# Altium PCB HARDWARE_V2.PcbDoc
Units mil, origin at the board's own origin, x right, y up, seen from the top; angles counter-clockwise.
Board outline 3937.01 x 2775 mil, 2 copper layers (Top Layer, Bottom Layer); 51 components, 31 nets, 229 pads, 29 vias.
Unrouted connection lines stored in the file: 11.
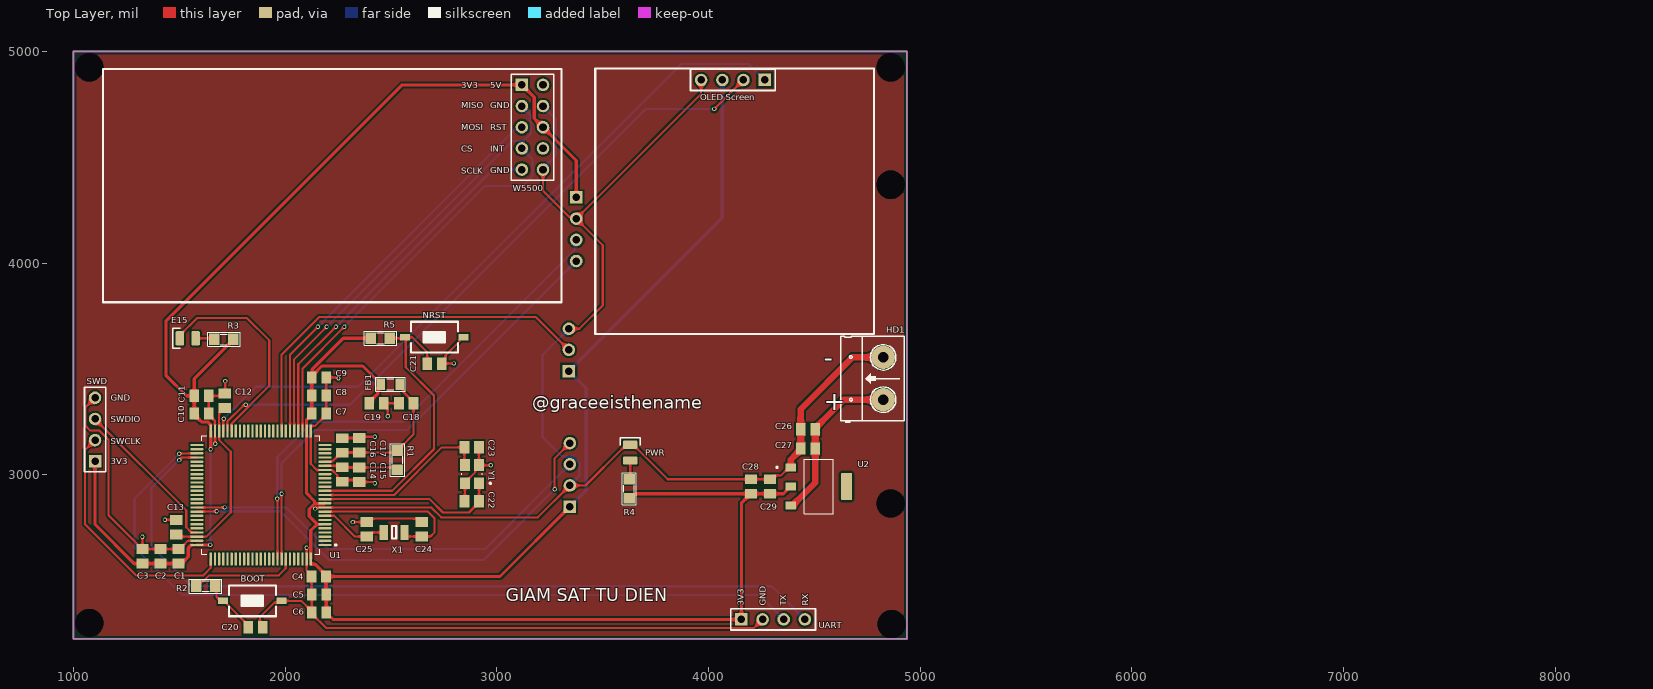
[diagram p0: Top Layer view]
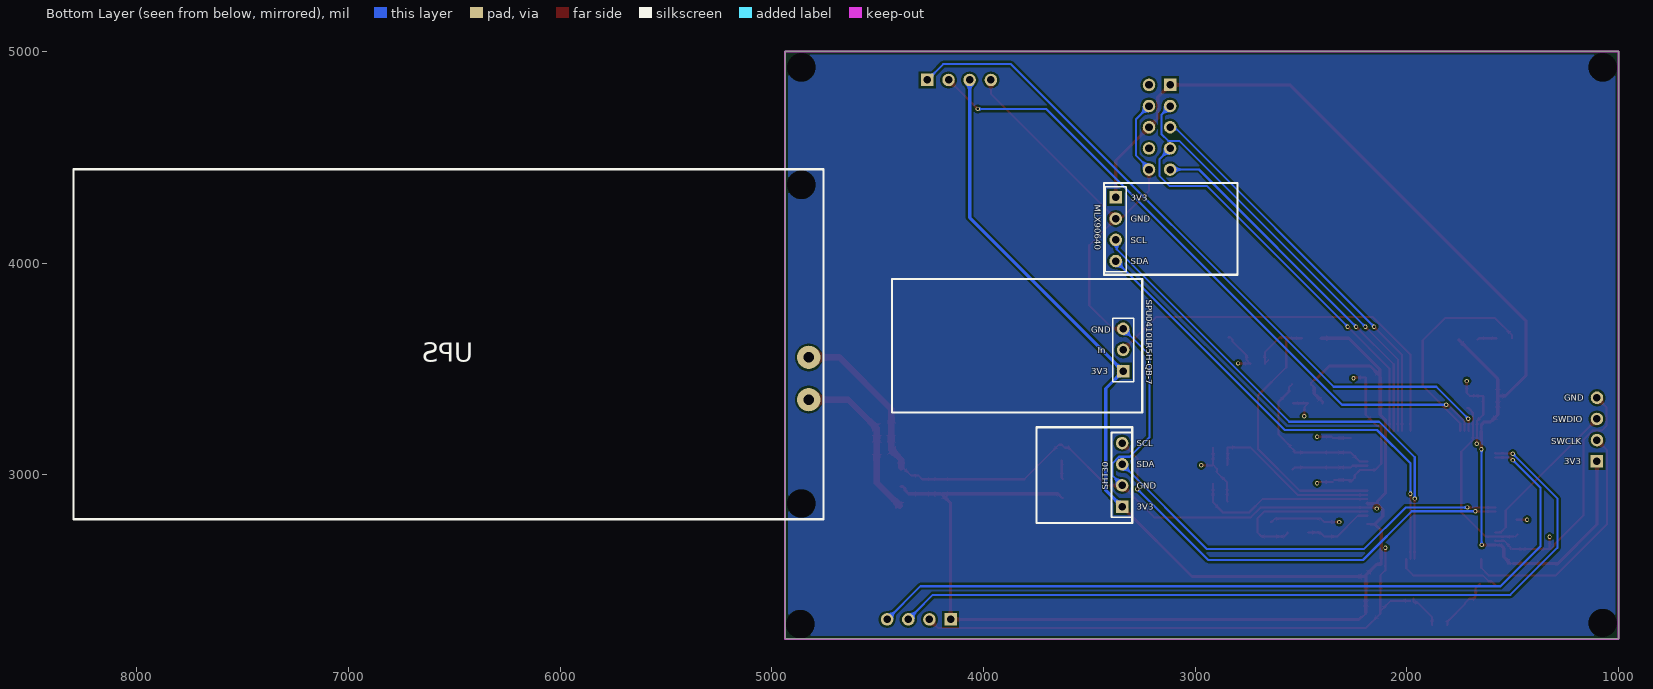
[diagram p1: Bottom Layer view, seen from below]
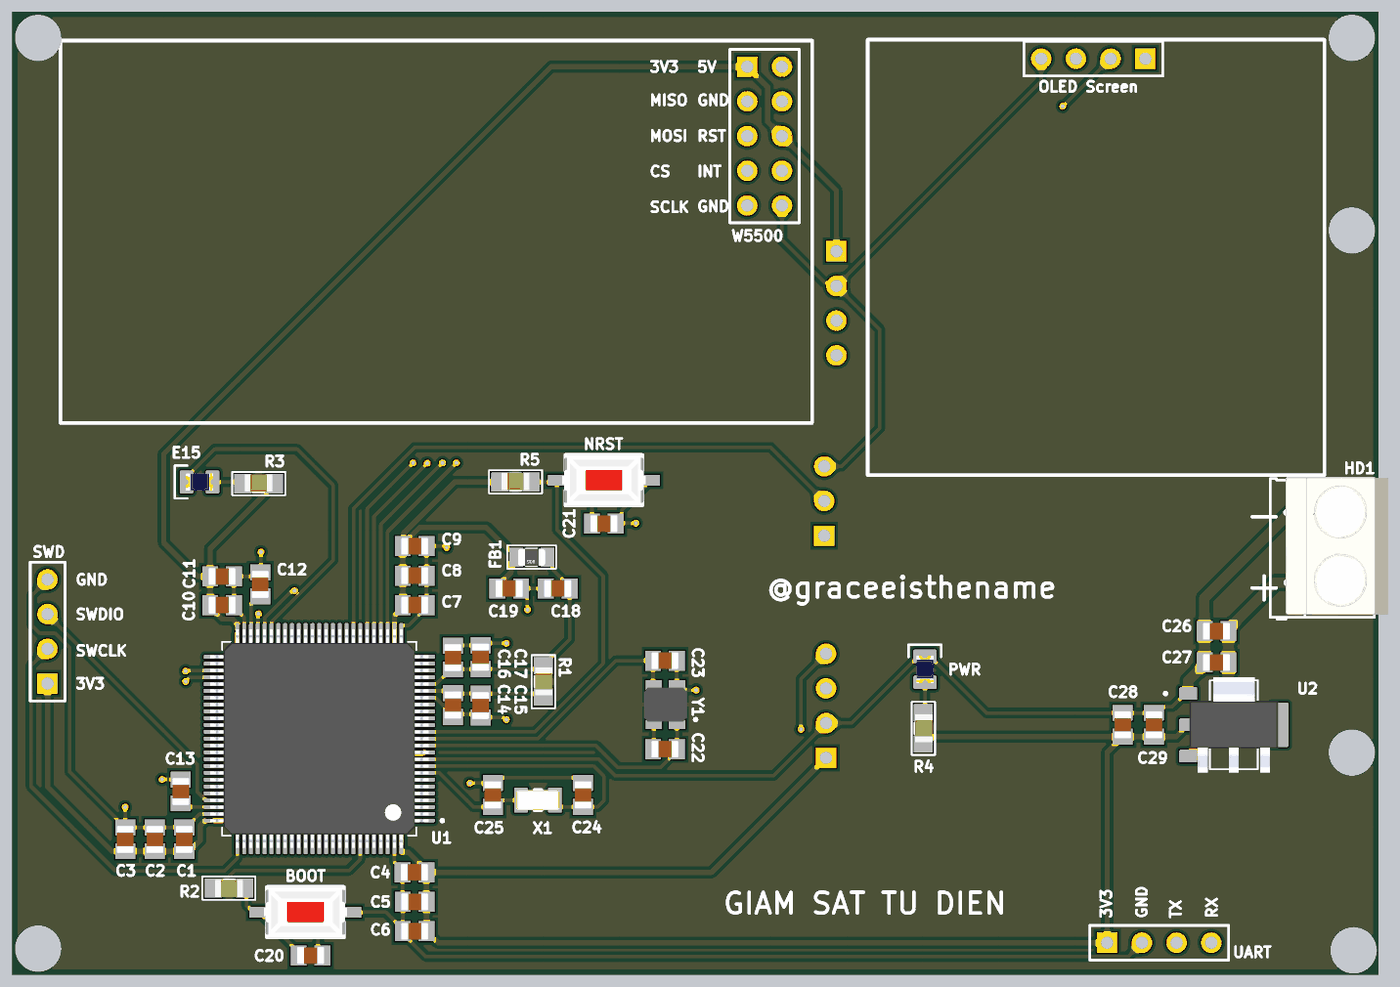
[diagram p2: 3D render of the assembled board from above, using the file's embedded part models]

## Layer stack, top to bottom
Top Solder: solder mask 0.4, Solder Resist, Dk 3.5
Top Layer: signal copper 1.4
Dielectric 1: dielectric 12.6, FR-4, Dk 4.8
Bottom Layer: signal copper 1.4
Bottom Solder: solder mask 0.4, Solder Resist, Dk 3.5

## Board outline
1000,2225 1000,5000 4937.01,5000 4937.01,2225

## Design rules (kind name [scope] priority, off if disabled: settings)
Clearance [All] p1: gap=1 ignorepadtopadclearanceinfootprint=TRUE
Creepage [All] p1: checkdistance=10 applytopolygonpour=TRUE
PolygonConnect [All] p1: connectstyle=Relief reliefconductorwidth=10 reliefentries=4 polygonreliefangle="90 Angle" airgapwidth=10
RoutingVias [All] p1: holewidth=28 width=50 viastyle="Through Hole" minholewidth=28 minwidth=50 maxholewidth=28 maxwidth=50
SolderMaskExpansion [All] p1: expansion=4 istentingtop=FALSE
Width [All] p1: maxlimit=50 minlimit=10 preferedwidth=10 minimp=50.000000 maximp=50.000000 favimp=50.000000
30 further rules are at their usual default settings.

## Classes and differential pairs
component class Display: "OLED Screen" UART
component class Sensors: MLX90640 SHT30 SPU0410LR5H-QB-7
component class Power: C26 C27 C28 C29 HD1 PWR R4 U2
component class MCU: BOOT C1 C2 C3 C4 C5 C6 C7 C8 C9 C10 C11 C12 C13 C14 C15 C16 C17 C18 C19 C20 C21 C22 C23 C24 C25 E15 FB1 NRST R1 R2 R3 R5 SWD U1 X1 Y1
component class Ethernet: W5500

## Components (designator, comment, footprint, x,y, rotation, side; value= is the part's Value field where it differs from the comment)
BOOT "SW-SMD" SW-SMD 1845,2405 r0 top
C1 "100nF" CAPC2012X145N 1496,2615 r270 top
C2 "100nF" CAPC2012X145N 1411,2615 r270 top
C3 "100nF" CAPC2012X145N 1326,2615 r270 top
C4 "100nF" CAPC2012X145N 2159.29,2520 r0 top
C5 "100nF" CAPC2012X145N 2160,2435 r0 top
C6 "100nF" CAPC2012X145N 2160,2350 r0 top
C7 "100nF" CAPC2012X145N 2160,3290 r180 top
C8 "100nF" CAPC2012X145N 2160,3375 r180 top
C9 "100nF" CAPC2012X145N 2160,3460 r180 top
C10 "100nF" CAPC2012X145N 1605,3290 r180 top
C11 "4.7uF" CAPC2012X145N 1605,3373 r180 top
C12 "2.2uF" CAPC2012X145N 1715,3350 r270 top
C13 "2.2uF" CAPC2012X145N 1486,2753 r270 top
C14 "100nF" CAPC2012X145N 2270,3002 r90 top
C15 "1uF" CAPC2012X145N 2350,3000.71 r90 top
C16 "100nF" CAPC2012X145N 2270,3139 r270 top
C17 "1uF" CAPC2012X145N 2350,3140 r270 top
C18 "100nF" CAPC2012X145N 2572,3338 r0 top
C19 "100nF" CAPC2012X145N 2432,3338 r180 top
C20 "100nF" CAPC2012X145N 1860,2280 r180 top
C21 "100nF" CAPC2012X145N 2705,3525 r180 top
C22 "10pF" CAPC2012X145N 2881,2875 r0 top
C23 "10pF" CAPC2012X145N 2881,3130 r180 top
C24 "10pF" CAPC2012X145N 2645,2743 r270 top
C25 "10pF" CAPC2012X145N 2385,2743 r270 top
C26 "100nF" CAPC2012X145N 4470,3215 r0 top
C27 "10uF" CAPC2012X145N 4470,3125 r0 top
C28 "100nF" CAPC2012X145N 4200,2945 r270 top
C29 "10uF" CAPC2012X145N 4290,2945 r270 top
E15 "BLUE" LED_0805_BLUE 1540,3645 r0 top
FB1 "Ferrit Bead" RES-SMD-0805 2497,3428 r180 top
HD1 "Header 2" HED2 4825,3355 r90 top
MLX90640 "Header 4" HDR1X4 3375,4310 r270 bottom
NRST "SW-SMD" SW-SMD 2705,3650 r0 top
"OLED Screen" "Header 4" HDR1X4 4265,4865 r180 top
PWR "BLUE" LED_0805_BLUE 3630,3105 r270 top
R1 "47" SM-0805 2530,3070 r90 top value=1K
R2 "10K" SM-0805 1625,2475 r0 top value=1K
R3 "10K" SM-0805 1710,3640 r180 top value=1K
R4 "10K" SM-0805 3625,2935 r90 top value=1K
R5 "10K" SM-0805 2450,3645 r180 top value=1K
SHT30 "Header 4" HDR1X4 3345,2850 r90 bottom
SPU0410LR5H-QB-7 "Header 3" HDR1X3 3340,3490 r90 bottom
SWD "Header 4" HDR1X4 1102,3064 r90 top
U1 "STM32H743VIT6" QFP50P1600X1600X160-100N 1885,2905 r180 top
U2 "AMS1117-3.3" SOT229P700X180-4N 4520,2945 r0 top
UART "Header 4" HDR1X4 4155,2317 r0 top
W5500 "Header 5X2" HDR2X5 3118,4842 r270 top
X1 "32.768kHz" XTAL_3215-2 2515,2728 r180 top
Y1 "25MHz" XTAL_ABM8G-25.000MHZ-B4Y-T 2882.54,3003.31 r180 top

## Footprints (in the part's own frame and the unit in brackets; to place one, negate y for a bottom-side part, rotate by r counter-clockwise, add the part's x,y. Pads: shape width x height; smd on the part's side, far side on the other; paste and mask are expansions set on the pad)
CAPC2012X145N [mm]
  rect 1.17x1.47 smd: 1(-0.871,0) 2(0.871,0)
  body extent -1,-0.63 1,0.63, height 1.45
HDR1X3 [mm] "Connector; Header; 3 Position"
  rect 1.5x1.5 hole 0.9: 1(0,0)
  round 1.5 hole 0.9: 2(2.54,0) 3(5.08,0)
  silkscreen extent -1.27,-1.27 6.35,1.27, body extent -1.27,-1.27 6.35,1.27, height 7
HDR1X4 [mm] "Connector; Header; 4 Position"
  rect 1.5x1.5 hole 0.9: 1(0,0)
  round 1.5 hole 0.9: 2(2.54,0) 3(5.08,0) 4(7.62,0)
  silkscreen extent -1.27,-1.27 8.89,1.27, body extent -1.27,-1.27 8.89,1.27, height 7
HDR2X5 [mm] "Connector; Header; 5x2 Position"
  rect 1.5x1.5 hole 0.9: 1(0,0)
  round 1.5 hole 0.9: 2(0,2.54) 3(2.54,0) 4(2.54,2.54) 5(5.08,0) 6(5.08,2.54) 7(7.62,0) 8(7.62,2.54) 9(10.16,0) 10(10.16,2.54)
  silkscreen extent -1.27,-1.27 11.43,3.81, body extent -1.27,-1.27 11.43,3.81, height 7
HED2 [mil] "Header 2, 2 pin, hight 300mil, Pin to Pin 200, Colour Green"
  round 110 hole 50: 1(0,0) 2(200,0)
  silkscreen extent -106,-100 300,200, body extent -92,-140 302,155, height 394
LED_0805_BLUE [mm]
  rrect25% 1x1.7 smd: A(0.95,0) K(-0.95,0)
  silkscreen extent -1.8,-1.2 -0.9,1.2, body extent -1,-0.63 1,0.63, height 1.12
QFP50P1600X1600X160-100N [mm]
  rrect50% 1.56x0.28 smd: 1(-7.68,6) 2(-7.68,5.5) 3(-7.68,5) 4(-7.68,4.5) 5(-7.68,4) 6(-7.68,3.5) 7(-7.68,3) 8(-7.68,2.5) 9(-7.68,2) 10(-7.68,1.5) 11(-7.68,1) 12(-7.68,0.5) 13(-7.68,0) 14(-7.68,-0.5) 15(-7.68,-1) 16(-7.68,-1.5) 17(-7.68,-2) 18(-7.68,-2.5) 19(-7.68,-3) 20(-7.68,-3.5) 21(-7.68,-4) 22(-7.68,-4.5) 23(-7.68,-5) 24(-7.68,-5.5) 25(-7.68,-6) 51(7.68,-6) 52(7.68,-5.5) 53(7.68,-5) 54(7.68,-4.5) 55(7.68,-4) 56(7.68,-3.5) 57(7.68,-3) 58(7.68,-2.5) 59(7.68,-2) 60(7.68,-1.5) 61(7.68,-1) 62(7.68,-0.5) 63(7.68,0) 64(7.68,0.5) 65(7.68,1) 66(7.68,1.5) 67(7.68,2) 68(7.68,2.5) 69(7.68,3) 70(7.68,3.5) 71(7.68,4) 72(7.68,4.5) 73(7.68,5) 74(7.68,5.5) 75(7.68,6)
  rrect50% 0.28x1.56 smd: 26(-6,-7.68) 27(-5.5,-7.68) 28(-5,-7.68) 29(-4.5,-7.68) 30(-4,-7.68) 31(-3.5,-7.68) 32(-3,-7.68) 33(-2.5,-7.68) 34(-2,-7.68) 35(-1.5,-7.68) 36(-1,-7.68) 37(-0.5,-7.68) 38(0,-7.68) 39(0.5,-7.68) 40(1,-7.68) 41(1.5,-7.68) 42(2,-7.68) 43(2.5,-7.68) 44(3,-7.68) 45(3.5,-7.68) 46(4,-7.68) 47(4.5,-7.68) 48(5,-7.68) 49(5.5,-7.68) 50(6,-7.68) 76(6,7.68) 77(5.5,7.68) 78(5,7.68) 79(4.5,7.68) 80(4,7.68) 81(3.5,7.68) 82(3,7.68) 83(2.5,7.68) 84(2,7.68) 85(1.5,7.68) 86(1,7.68) 87(0.5,7.68) 88(0,7.68) 89(-0.5,7.68) 90(-1,7.68) 91(-1.5,7.68) 92(-2,7.68) 93(-2.5,7.68) 94(-3,7.68) 95(-3.5,7.68) 96(-4,7.68) 97(-4.5,7.68) 98(-5,7.68) 99(-5.5,7.68) 100(-6,7.68)
  silkscreen extent -9.1,-7.1 7.1,7.1, body extent -8,-8 8,8, height 1.6
RES-SMD-0805 [mil]
  rect 39.37x55 smd: 1(-45,0) 2(45,0)
  silkscreen extent -70,-34 70,33, body extent -39,-25 39,25, height 31
SM-0805 [mil] "Compoment SMD 80x50mil"
  rect 50x55 smd: 1(-45,0) 2(45,0)
  silkscreen extent -77,-34 76,33, body extent -40,-27 40,23, height 24
SOT229P700X180-4N [mm]
  rrect15% 1.31x0.93 smd: 1(-3.345,2.29) 2(-3.345,0) 3(-3.345,-2.29)
  rrect15% 1.31x3.24 smd: 4(3.345,0)
  silkscreen extent -5.1,-3.25 1.75,3.25, body extent -3.25,-3.5 3.25,3.5, height 1.8
SW-SMD [mm] "Switch SMD type"
  rect 1.2x0.8 smd: 1(-3.5,0) 2(3.5,0)
  silkscreen extent -2.82,-1.85 2.82,1.85, body extent -3.05,-1.85 3.05,1.85, height 2.5
XTAL_3215-2 [mm]
  rrect10% 1x1.8 smd: 1(-1.25,0) 2(1.25,0)
  silkscreen extent -0.25,-0.75 0.25,0.75, body extent -1.6,-0.75 1.6,0.75, height 0.91
XTAL_ABM8G-25.000MHZ-B4Y-T [mm]
  rect 1.2x1.4 smd: 1(-0.85,1.1) 2(-0.85,-1.1) 3(0.85,-1.1) 4(0.85,1.1)
  silkscreen extent -2.3,-0.08 1.25,1.2, body extent -1.6,-1.24 1.6,1.24, height 0.99

## Part data
BOOT NRST: "Switch", LatestRevisionDate=17-Jul-2002, LatestRevisionNote="Re-released for DXP Platform.", PackageReference=SPST-2, Published=24-Mar-1999, Publisher="Altium Limited"
C1 C2 C3 C4 C5 C6 C7 C8 C9 C10 C12 C13 C14 C15 C16 C17 C18 C19 C20 C21 C22 C23 C24 C25 C26 C27 C28 C29: library part VJ0805A390GXCAP, "39 pF Â±2% 200V Ceramic Capacitor C0G, NP0 0805 (2012 Metric)", Package="2012 Vishay Vitramon", Check_prices=https://www.snapeda.com/parts/VJ0805A390GXCAP/Vishay/view-part/?ref=eda, MF="Vishay Vitramon", MP=VJ0805A390GXCAP, SnapEDA_Link=https://www.snapeda.com/parts/VJ0805A390GXCAP/Vishay/view-part/?ref=snap
C11: library part CAP_TAN_SMD, "Polazied Tantalum Capacitor"
E15 PWR: library part LED_0805_BLUE, "LED 0805 BLUE SMD"
FB1: "Generic Ferrit Bead"
HD1: library part Hed2, "Header 2 (Green)"
MLX90640 "OLED Screen" SHT30 SWD UART: "Header, 4-Pin", LatestRevisionDate=17-Jul-2002, LatestRevisionNote="Re-released for DXP Platform.", Publisher="Altium Limited"
R1 R2 R3 R4 R5: library part RM, "Resistor SMD"
SPU0410LR5H-QB-7: "Header, 3-Pin", LatestRevisionDate=17-Jul-2002, LatestRevisionNote="Re-released for DXP Platform.", Publisher="Altium Limited"
U1: "ARMÂ® CortexÂ®-M7 STM32H7 Microcontroller IC 32-Bit Single-Core 480MHz 2MB (2M x 8) FLASH 100-LQFP (14x14)", Package="LQFP-100 STMicroelectronics", Check_prices=https://www.snapeda.com/parts/STM32H743VIT6/STMicroelectronics/view-part/?ref=eda, MF=STMicroelectronics, MP=STM32H743VIT6, SnapEDA_Link=https://www.snapeda.com/parts/STM32H743VIT6/STMicroelectronics/view-part/?ref=snap
U2: "Sot223/Pkg 1-Amp 3.3-Volt Low Drop Out Voltage Regulatator", Package="SOT-223 Seeed Technology", Check_prices=https://www.snapeda.com/parts/AMS1117-3.3/Advanced+Monolithic+Systems/view-part/?ref=eda, MF="Advanced Monolithic Systems", MP=AMS1117-3.3, SnapEDA_Link=https://www.snapeda.com/parts/AMS1117-3.3/Advanced+Monolithic+Systems/view-part/?ref=snap
W5500: "Header, 5-Pin, Dual row", LatestRevisionDate=17-Jul-2002, LatestRevisionNote="Re-released for DXP Platform.", Publisher="Altium Limited"
X1: library part XTAL_3215, "Crystal SMD 3215"
Y1: library part ABM8G-25.000MHZ-B4Y-T, "25 MHz Â±30ppm Crystal 10pF 60 Ohms 4-SMD, No Lead", Package="SMD-4 Abracon", Availability="In Stock", Check_prices=https://www.snapeda.com/parts/ABM8G-25.000MHZ-B4Y-T/Abracon+LLC/view-part/?ref=eda, MF=Abracon, MP=ABM8G-25.000MHZ-B4Y-T, Price=None, Purchase-URL=https://pricing.snapeda.com/search/part/ABM8G-25.000MHZ-B4Y-T/?ref=eda, SnapEDA_Link=https://www.snapeda.com/parts/ABM8G-25.000MHZ-B4Y-T/Abracon+LLC/view-part/?ref=snap

## Free pads (board coordinates)
  round 60 hole 133.86 unplated: 2(4865,2295) 3(4860,2865) 4(4860,4370) 5(4860,4925) 6(1075,4925) 7(1075,2300)

## Via types
v1: diameter 20, hole 11.81, Top Layer to Bottom Layer, 28 vias
v2: diameter 20, hole 10, Top Layer to Bottom Layer, 1 vias

## Nets (pads, with @x,y where several pads share a name; then routed paths per layer and width w, separated by ;. In a path a pad name is that pad's centre, name@x,y a point inside that pad or via, vN(x,y) a via of type N, cw(c..) or ccw(c..) an arc to the next point about the centre after c; other vN are vias at no path point)
12V: C26.2 C27.2 HD1.1 U2.3 | length 794.7
  Top Layer w10: U2.3 U2.3@4395.79,2854.84
  Top Layer w20: C26.2 C26.2@4504.29,3220.91
  Top Layer w30: U2.3@4395.79,2854.84 4504.29,2963.35 C27.2 C26.2 ; C26.2@4504.29,3220.91 4638.39,3355 HD1.1
+3V3: "OLED Screen.3" C1.2 C2.2 C3.2 C4.2 C5.2 C6.2 C7.2 C8.2 C9.2 C10.2 C11.2 C19.2 C28.2 C29.2 FB1.2 MLX90640.1 R3.1 R4.1 R5.2 SHT30.1 SPU0410LR5H-QB-7.1 SWD.1 U1.6 U1.11 U1.27 U1.50 U1.75 U1.100 U2.2 UART.1 W5500.1 W5500.6 | length 14496.8
  Top Layer w10: C1.2 C1.2@1501.91,2580.71 ; U1.75@1555.27,2668.27 1582.13,2668.27 U1.75 U1.75@1582.75,2668.89 ; C10.2@1570.71,3284.09 C10.2 ; v1@1645.89,2668.89 v1(1646,2669) ; v1(1648,3121) v1@1648.39,3121.39 ; U1.50@1648.27,3236.73 1648.27,3207.87 U1.50 U1.50@1648.39,3206.97 ; R3.1@1755,3637.5 R3.1 ; U1.100 2121.22,2578.27 U1.100@2121.73,2577.76 ; C7.2@2125.71,3284.09 C7.2 ; C9.2 2125.71,3465.91 C9.2@2128.08,3468.28 ; 2151.2,2767.2 U1.6 ; C5.2@2193.58,2435.71 C5.2 ; C4.2 C4.2@2193.58,2525.91 ; C6.2 2194.29,2344.09 2212.32,2326.06 2218.23,2326.06 ; C19.2 C19.2@2397.71,3343.91 ; 2429.5,3450.5 2437.32,3450.5 2452,3435.81 FB1.2 FB1.2@2437.32,3413.31 ; R4.1 3627.5,2890 R4.1@3648.21,2910.71 ; C28.2@4194.09,2910.71 C28.2
  Top Layer w15: SWD.1 1102,2766 1287.29,2580.71 C3.2 C2.2 C1.2 ; C1.2@1510.91,2580.71 1542,2611.8 1542,2655 U1.75@1555.27,2668.27 ; C10.2@1570.71,3284.09 1604.8,3250 1635,3250 U1.50@1648.27,3236.73 ; C10.2 C11.2 ; U1.75@1582.75,2668.89 v1@1645.89,2668.89 ; v1@1648.39,3121.39 U1.50@1648.39,3206.97 ; R3.1@1755,3637.5 1570.71,3453.21 C11.2 ; U1.100 2121.22,2737.22 2151.2,2767.2 2114,2804.41 2114,2838.8 2138.89,2863.68 ; U1.100@2121.73,2577.76 2141.73,2577.76 C4.2@2193.58,2525.91 ; C7.2@2125.71,3284.09 2101.54,3259.92 U1.27 2101.54,2913.46 2138.89,2876.11 2138.89,2863.68 ; C7.2 C8.2 C9.2 ; U1.11 2185.42,2863.68 2138.89,2863.68 ; C5.2@2193.58,2435.71 C4.2 3015,2520 SHT30.1 ; C6.2 C5.2 ; 2218.23,2326.06 2227.29,2317 UART.1 4155,2865.71 C28.2@4194.09,2904.8 ; C19.2@2397.71,3343.91 2437.32,3383.51 FB1.2@2437.32,3413.31 ; R5.2 2275,3645 2128.08,3498.08 2128.08,3468.28 2173.8,3514 2366,3514 2429.5,3450.5 ; MLX90640.1 3375,4485 W5500.6 3177,4683 3177,4783 W5500.1 2553,4842 1437,3726 1437,3470 1534,3373 C11.2 ; R4.1@3648.21,2910.71 C28.2@4194.09,2910.71 ; C28.2 C29.2 4354.02,2910.71 4370.02,2926.71 4370.02,2934.19 4380.83,2945 U2.2
  Bottom Layer w10: v1(1646,2669) 1647,2670 1647,3120 v1(1648,3121)
  Bottom Layer w15: SHT30.1 3422,2927 3422,3408 SPU0410LR5H-QB-7.1 4065,4215 4065,4865
ADC1_IN8: SPU0410LR5H-QB-7.2 U1.33 | length 1855
  Top Layer w10: U1.33 1983.43,3568.43 2160,3745 3185,3745 SPU0410LR5H-QB-7.2
BOOT0: R2.1 U1.94 | length 503.5
  Top Layer w10: R2.1 1580,2477.5 1600,2497.5 1613.5,2497.5 1641,2525 1970,2525 2003.11,2558.11 U1.94
GND: "OLED Screen.4" BOOT.2 C1.1 C2.1 C3.1 C4.1 C5.1 C6.1 C7.1 C8.1 C9.1 C10.1 C11.1 C12.1 C13.1 C14.1 C15.1 C16.1 C17.1 C18.1 C19.1 C20.1 C21.1 C22.1 C23.1 C24.1 C25.1 C26.1 C27.1 C28.1 C29.1 HD1.2 MLX90640.2 NRST.2 PWR.K SHT30.2 SPU0410LR5H-QB-7.3 SWD.4 U1.10 U1.19 U1.26 U1.49 U1.74 U1.99 U2.1 UART.2 W5500.4 W5500.10 Y1.2 Y1.4 | length 12961.6
  Top Layer w10: SWD.4 1057,3319 1057,3232 1080,3209 1123,3209 1166,3166 1166,2809.29 1302.06,2673.23 1302.06,2667.32 1320.09,2649.29 C3.1 ; v1(1326,2708) C3.1 ; v1(1432,2788) C13.1@1482.71,2788 ; C1.1@1501.91,2649.29 C1.1 C2.1 C3.1 ; C1.1@1510.91,2649.29 1510.91,2658.29 1540.57,2687.95 1582.13,2687.95 U1.74 ; v1(1670,3147) 1668.98,3148.02 1668.98,3206.85 U1.49 1668.46,3254.92 1639.29,3284.09 C10.1 C11.1 1703.71,3373 C12.1 1717,3386.29 v1(1717,3443) ; C20.1@1879.29,2290 1880.87,2291.58 1880.87,2328.08 1949.17,2396.38 1950.03,2397.24 1964.17,2397.24 1967.8,2400.86 BOOT.2@1967.8,2415 ; BOOT.2 2076.61,2405 C6.1@2125.71,2355.91 ; v1(2101,2656) 2101.27,2655.73 2101.27,2602.91 U1.99 2101.54,2549.37 2125,2525.91 C4.1 2125,2435.71 C5.1 C6.1@2125.71,2355.91 ; v1(2142.18,2840.82) 2144.89,2840.82 2149.51,2845.43 2186.85,2845.43 U1.10 2690.06,2845.94 2737,2799 3194,2799 SHT30.2 3419,2950 3596.72,3127.72 3615.31,3127.72 PWR.K 3643.78,3142.4 3806.89,2979.29 C28.1 C29.1 4308.03,2997.32 4342.99,2997.32 4380.83,3035.16 U2.1 ; v2(2252,3456) 2249.29,3456 2245.29,3460 C9.1 C8.1 C7.1 2194.29,3284.09 2141.73,3231.54 2121.73,3231.54 2121.22,3231.02 U1.26 2121.22,3051.78 2149.89,3023.11 U1.19 2187.87,3022.6 2221.4,3022.6 2246.06,2997.94 2246.06,2985.74 2264.09,2967.71 C14.1 ; C16.1@2264.09,3173.29 C16.1 ; C14.1@2265,2975.71 C15.1@2345,2975.71 ; C16.1@2265,3174.29 C17.1 2355.71,3180 v1(2424,3180) ; v1(2319,2777) 2384.71,2777 C25.1 2390.91,2777.29 2406.61,2793 2623.39,2793 2639.09,2777.29 C24.1 ; C15.1 2414.88,2966.42 2421.29,2960 v1(2424,2960) ; v1(2485,3277) 2484.32,3277.68 2484.32,3319.97 C19.1 C18.1 ; v1(2797,3526) 2740.29,3526 C21.1 2757.32,3543.03 2757.32,3564.53 2824.17,3631.38 2824.17,3639.25 2834.92,3650 NRST.2 ; C22.1 2849.07,2877.36 Y1.4 2849.07,2963.94 2897.38,3012.24 2897.38,3029.41 2915.29,3047.32 C23.1 ; Y1.2 2917.61,3045 v1(2971,3045) ; W5500.10 3218,4342 3340.61,4219.39 3365.61,4219.39 MLX90640.2 ; SPU0410LR5H-QB-7.3 3390,3690 3500,3800 3500,4085 MLX90640.2 ; 3965,4865 3965,4800 MLX90640.2 ; UART.2 4215,2277 2192.8,2277 2125.71,2344.09 C6.1 C6.1@2125.71,2355.91 ; C27.1@4435.71,3119.09 C27.1
  Top Layer w20: C26.1@4435,3215.71 C26.1
  Top Layer w30: U2.1 4388.31,3071.69 C27.1@4435.71,3119.09 ; C26.1@4435,3215.71 4435,3310 4680,3555 HD1.2 ; C27.1 C26.1
  Bottom Layer w10: W5500.10 3218,4447 3279,4508 3279,4681 W5500.4 ; SPU0410LR5H-QB-7.3 3215,3565 3215,3179 3308.47,3085.53 3359.72,3085.53 3390,3055.24 3390,2995 SHT30.2
HSE_IN: C22.2 U1.12 Y1.1 | length 864.6
  Top Layer w10: U1.12 2682.68,2885.32 2746,2822 2868.2,2822 2915.29,2869.09 C22.2 ; C22.2@2916,2875 Y1.1
HSE_OUT: C23.2 U1.13 Y1.3 | length 836.9
  Top Layer w10: U1.13 2515,2905 2740,3130 C23.2 2846.71,3048.98 Y1.3
I2C1_SCL: MLX90640.3 U1.92 | length 2341.5
  Top Layer w10: v1(1963,2888) 1963.74,2887.26 U1.92
  Bottom Layer w10: v1(1963,2888) 1963,3083 2131,3251 2556,3251 3370.47,4065.47 3370.47,4105.47 MLX90640.3
I2C1_SDA: MLX90640.4 U1.93 | length 2239.5
  Top Layer w10: v1(1983,2911) 1983.21,2910.79 1983.21,2602.85 U1.93
  Bottom Layer w10: v1(1983,2911) 1983,3054 2141,3212 2577,3212 MLX90640.4
I2C2_SCL: "OLED Screen.2" U1.46 | length 3150.5
  Top Layer w10: U1.46 1727.52,3252.52 1804.4,3329.4 1811.77,3329.4 v1(1813.69,3331.31) ; v1(4027,4728) 4027.5,4728 4164.5,4865 4165,4865
  Bottom Layer w10: v1(1813.69,3331.31) 2306.31,3331.31 3703,4728 v1(4027,4728)
I2C2_SDA: "OLED Screen.1" U1.47 | length 3338.4
  Top Layer w10: U1.47 1708.35,3207.87 1708.35,3263.35 v1(1710,3265)
  Bottom Layer w10: v1(1710,3265) 1861,3416 2346,3416 3870,4940 4190,4940 4265,4865
I2C3_SCL: SHT30.4 U1.67 | length 2172.5
  Top Layer w10: U1.67 1583.15,2826.77 1674.77,2826.77 v1(1676,2828) ; v1(3273,2932) 3273,3078 SHT30.4
  Bottom Layer w10: v1(1676,2828) 1977,2828 2207,2598 2938,2598 3272,2932 v1(3273,2932)
I2C3_SDA: SHT30.3 U1.66 | length 2010.1
  Top Layer w10: U1.66@1582.67,2845.97 v1(1714,2846)
  Bottom Layer w10: v1(1714,2846) 2006,2846 2203,2649 2944,2649 SHT30.3
LED: E15.K U1.45 | length 1014.6
  Top Layer w10: E15.K 1502.6,3658.78 1583.82,3740 1820,3740 1925,3635 1925,3420 1747.72,3242.72 1747.72,3235.41 1747.72,3207.87 U1.45
LSE_IN: C24.2 U1.9 X1.1 | length 758.2
  Top Layer w10: U1.9 2674.74,2826.26 2705,2796 2705,2727 2686.71,2708.71 C24.2 2578.9,2708.71 2564.21,2723.39 X1.1
LSE_OUT: C25.2 U1.8 X1.2 | length 327
  Top Layer w10: U1.8 2231.43,2806.57 2329.29,2708.71 C25.2 2390.91,2708.71 2410.2,2728 X1.2
NetBOOT_1: BOOT.1 C20.2 R2.2 | length 270.8
  Top Layer w10: R2.2@1655,2485 1675,2465 1675,2425.75 1685.75,2415 1692.2,2415 1705.08,2415 1725.83,2394.25 1725.83,2389.25 1807.68,2307.4 1807.68,2293.03 C20.2@1810.71,2290
NetE15_A: E15.A R3.2 | length 89.7
  Top Layer w10: E15.A 1660,3645 R3.2
NetPWR_A: PWR.A R4.2 | length 89.7
  Top Layer w10: R4.2 3630,2985 PWR.A
NRST: C21.2 NRST.1 R5.1 U1.14 | length 1467.2
  Top Layer w10: U1.14 2505.69,2924.69 2703,3122 2703,3375 2570,3508 2570,3642.8 NRST.1@2565,3647.8 ; R5.1 2562.2,3645 NRST.1@2565,3647.8 ; C21.2@2652.68,3543.03 C21.2 2670.71,3579.29 2600,3650 NRST.1 NRST.1@2565,3647.8
RX: U1.54 UART.4 | length 3778.3
  Top Layer w10: v1(1500,3070) 1511.65,3081.65 1582.13,3081.65 U1.54
  Bottom Layer w10: v1(1500,3070) 1369,2939 1369,2663 1558,2474 4298,2474 UART.4
SPI1_CS: U1.28 W5500.7 | length 1908.9
  Top Layer w10: U1.28 2081.85,3501.85 v1(2280,3700)
  Bottom Layer w10: v1(2280,3700) 2945,4365 3122,4365 3168,4411 3168,4492 W5500.7
SPI1_MISO: U1.30 W5500.3 | length 2045.1
  Top Layer w10: U1.30 2042.48,3545.48 v1(2196,3699)
  Bottom Layer w10: v1(2196,3699) 3074.53,4577.53 3127.53,4577.53 3159,4609 3159,4701 W5500.3
SPI1_MOSI: U1.31 W5500.5 | length 1900.6
  Top Layer w10: U1.31 2022.8,3567.8 v1(2155,3700)
  Bottom Layer w10: v1(2155,3700) 3087.61,4632.61 3108.61,4632.61 W5500.5
SPI1_SCLK: U1.29 W5500.9 | length 1751.6
  Top Layer w10: U1.29 2062.17,3522.17 v1(2240,3700)
  Bottom Layer w10: v1(2240,3700) 2982,4442 W5500.9
SWCLK: SWD.2 U1.76 | length 1168.8
  Top Layer w10: SWD.2 1054,3116 1054,2768 1298,2524 1612,2524 1648.78,2560.78 U1.76
SWDIO: SWD.3 U1.72 | length 751.2
  Top Layer w10: SWD.3 SWD.3@1111.39,3254.61 ; SWD.3@1110.39,3254.61 1533,2832 1533,2752.28 1557.44,2727.83 U1.72 U1.72@1582.13,2728.35
TX: U1.53 UART.3 | length 3821.8
  Top Layer w10: v1(1500,3100) 1501.34,3101.34 1582.13,3101.34 U1.53
  Bottom Layer w10: v1(1500,3100) 1289,2889 1289,2655 1511,2433 4239,2433 4321,2351 UART.3
VCAP: C12.2 C13.2 U1.48 U1.73 | length 839
  Top Layer w10: C13.2@1477,2718.71 C13.2@1487.56,2708.15 ; C13.2@1496.56,2708.15 U1.73 1628.15,2708.15 1743,2823 1743,3109 1688.15,3163.85 1688.15,3294.76 1709.09,3315.71 C12.2
VDDA: C16.2 C17.2 C18.2 FB1.1 R1.2 U1.21 | length 739.8
  Top Layer w10: U1.21 2187.87,3062.99 2222.28,3062.99 2245.97,3086.68 2246.06,3086.68 2264.79,3105.41 C16.2@2264.79,3105.5 ; C16.2@2265,3105.71 C17.2 2530.71,3105.71 R1.2@2535,3110 ; R1.2 2532.5,3115 2552.5,3135 2552.5,3137.5 2606.29,3191.29 C18.2 2606.29,3343.91 2556.69,3393.51 2556.69,3413.31 FB1.1
VREF: C14.2 C15.2 R1.1 U1.20 | length 360
  Top Layer w10: U1.20 2257.2,3042.8 2265,3035 C15.2 2530,3035 R1.1@2540,3025
pads on no net: U1.1 U1.2 U1.3 U1.4 U1.5 U1.7 U1.15 U1.16 U1.17 U1.18 U1.22 U1.23 U1.24 U1.25 U1.32 U1.34 U1.35 U1.36 U1.37 U1.38 U1.39 U1.40 U1.41 U1.42 U1.43 U1.44 U1.51 U1.52 U1.55 U1.56 U1.57 U1.58 U1.59 U1.60 U1.61 U1.62 U1.63 U1.64 U1.65 U1.68 U1.69 U1.70 U1.71 U1.77 U1.78 U1.79 U1.80 U1.81 U1.82 U1.83 U1.84 U1.85 U1.86 U1.87 U1.88 U1.89 U1.90 U1.91 U1.95 U1.96 U1.97 U1.98 U2.4 W5500.2 W5500.8

## Polygon pours and split planes (outlines as drawn)
no net on Top Layer "NONET_L01_P000" (solid, pour order 0): 998,5007 4941,5007 4941,2232 4947,2226 4941,2220 1002,2220 1002,5003
no net on Bottom Layer "NONET_L02_P001" (solid, pour order 1): 996,5002 4935,5002 4935,2234 4943,2226 996,2226 996,5003 994,5005

## Keep-outs
Keep-Out Layer:
  the board outline again, w10

## Silkscreen, mask and mechanical layers (free items; w line width, h text height)
Top Overlay:
  lines w10: 1139.65,3815 3305,3815 3305,4917.36 1139.65,4917.36 1139.65,3815 ; 3465,3665 4780.75,3665 4780.75,4920.12 3465,4920.12 3465,3665
  text "3V3" at 2831,4827 h30
  text "5V" at 2968,4827 h30
  text "MISO" at 2831,4731 h30
  text "GND" at 2968,4731 h30
  text "MOSI" at 2831,4628 h30
  text "RST" at 2968,4628 h30
  text "CS" at 2831,4526 h30
  text "INT" at 2968,4526 h30
  text "GND" at 2968,4425 h30
  text "SCLK" at 2831,4423 h30
  text "-" at 4545,3510.01 h90
  text "GND" at 1177,3349 h30
  text "@graceeisthename" at 3168,3312.99 h60
  text "+" at 4545,3305 h90
  text "SWDIO" at 1177,3249 h30
  text "SWCLK" at 1177,3144 h30
  text "3V3" at 1177,3049 h30
  text "GIAM SAT TU DIEN" at 3043,2402 h60
  text "3V3" at 4167,2382 h30 r90
  text "GND" at 4269,2382 h30 r90
  text "TX" at 4367,2382 h30 r90
  text "RX" at 4471,2382 h30 r90
Bottom Overlay:
  lines w10: 2800,3945 3429.92,3945 3429.92,4378.07 2800,4378.07 2800,3945 ; 3250,3295 4431.1,3295 4431.1,3924.92 3250,3924.92 3250,3295 ; 3297.24,2772.24 3750,2772.24 3750,3225 3297.24,3225 3297.24,2772.24 ; 4755,2790 8298.31,2790 8298.31,4443.54 4755,4443.54 4755,2790
  text "3V3" at 3305,4295 h30
  text "GND" at 3305,4195 h30
  text "SCL" at 3305,4095 h30
  text "SDA" at 3305,3995 h30
  text "GND" at 3490,3670 h30
  text "In" at 3460,3575 h30
  text "UPS" at 6410,3535 h90
  text "3V3" at 3490,3475 h30
  text "GND" at 1257,3349 h30
  text "SWDIO" at 1312,3249 h30
  text "SWCLK" at 1317,3144 h30
  text "SCL" at 3275,3135 h30
  text "3V3" at 1257,3049 h30
  text "SDA" at 3275,3035 h30
  text "GND" at 3275,2935 h30
  text "3V3" at 3275,2835 h30

## Text inside footprints (layer, text, board x,y; h text height)
E15: Mechanical 13 "+" at 1609.56,3684.38 h39.37
PWR: Mechanical 13 "+" at 3550.32,3033.12 h39.37 r270